# Altium PCB PCB_MainBoard.PcbDoc
Units mm, origin at the board's own origin, x right, y up, seen from the top; angles counter-clockwise.
Board outline 88.01 x 85.6 mm, 2 copper layers (Top Layer, Bottom Layer); 23 components, 28 nets, 103 pads, 8 vias.
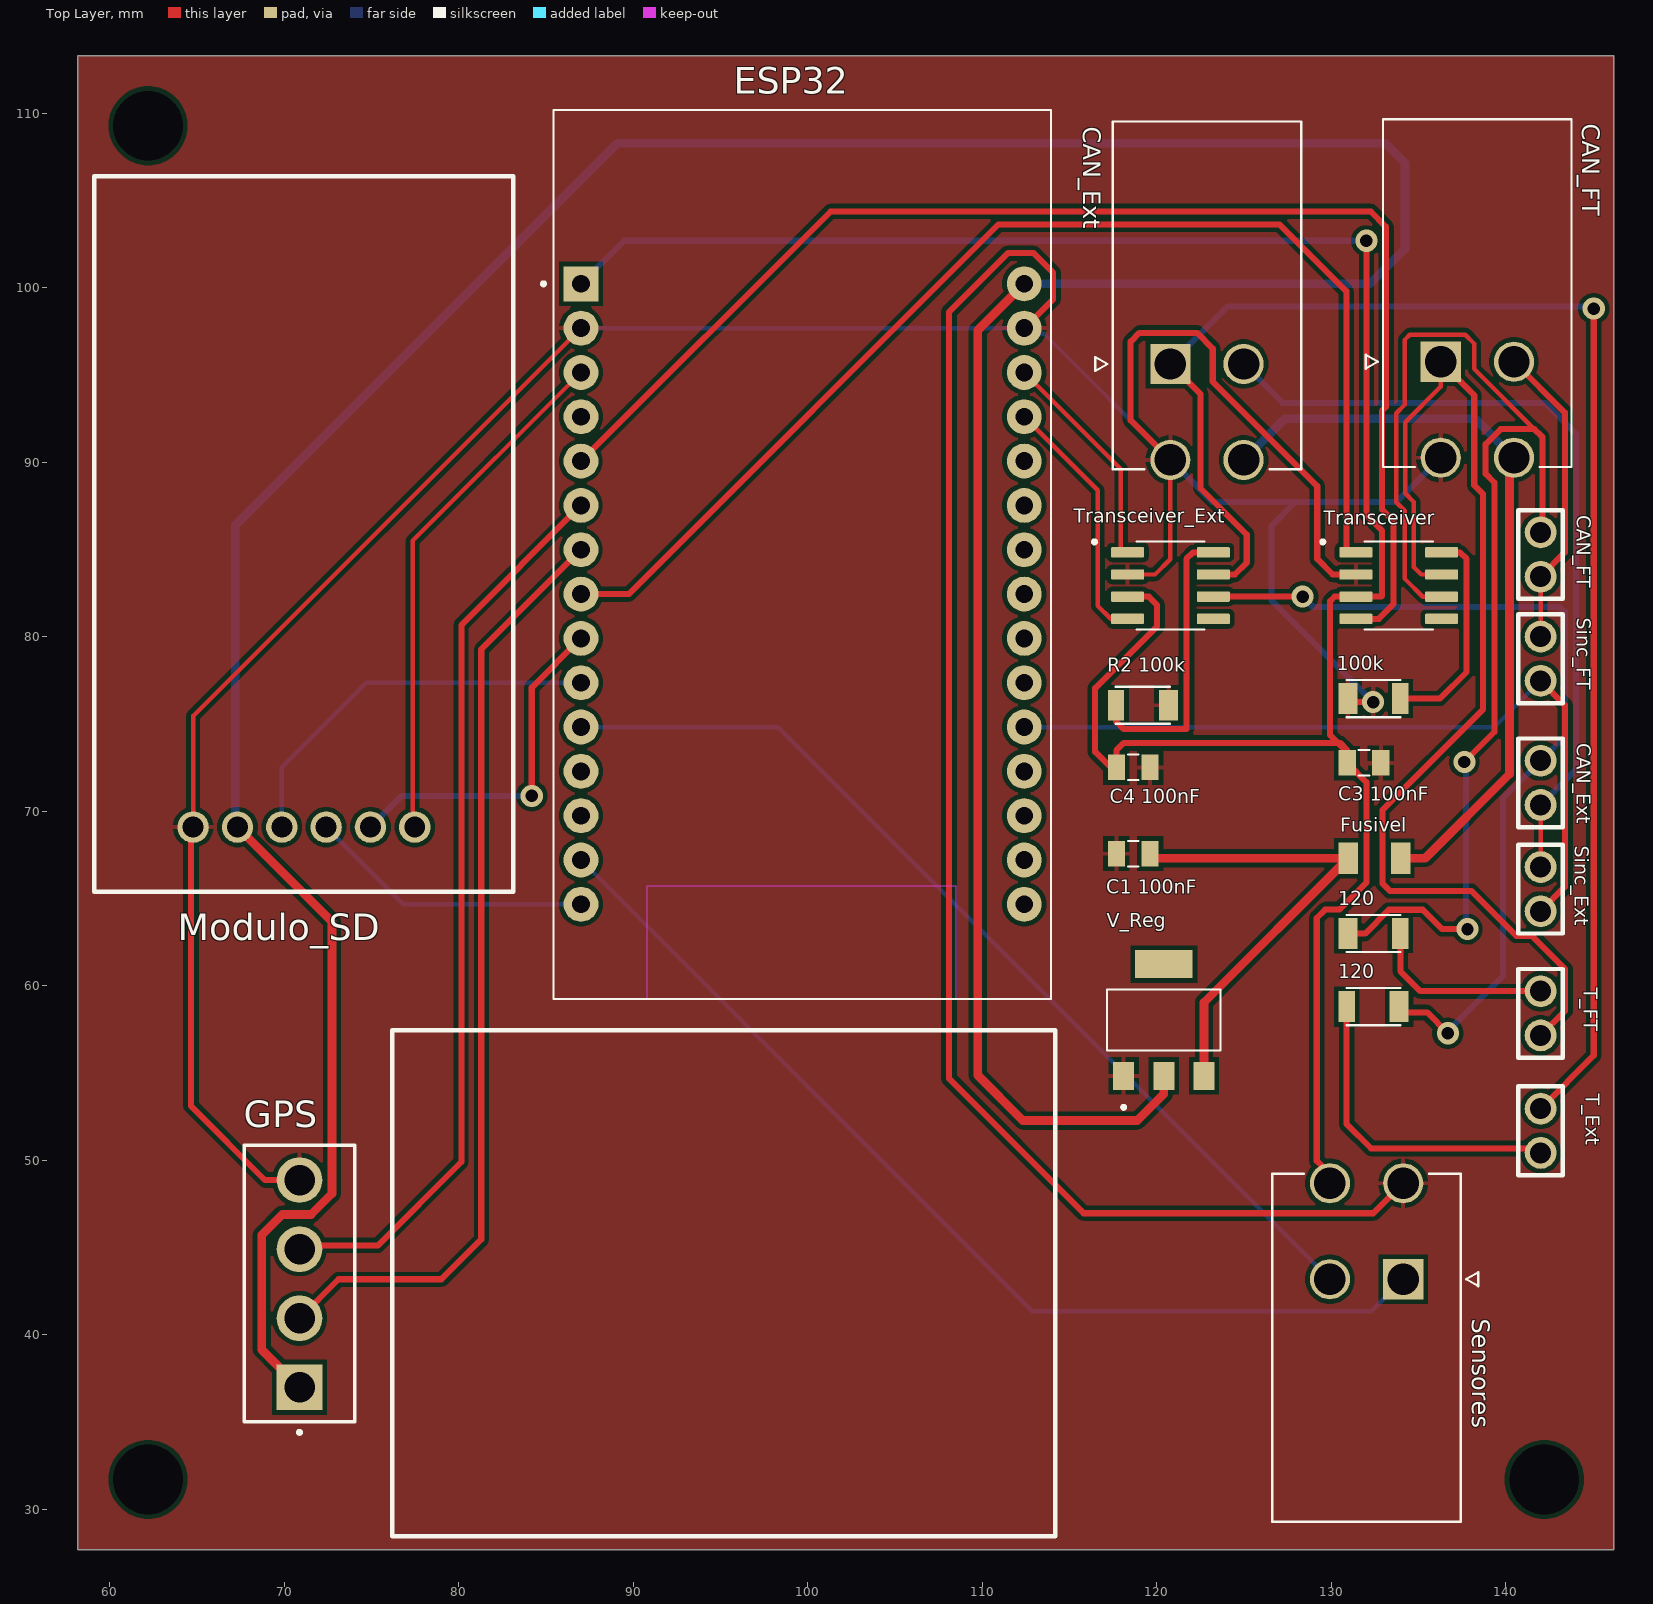
[diagram p0: Top Layer view]
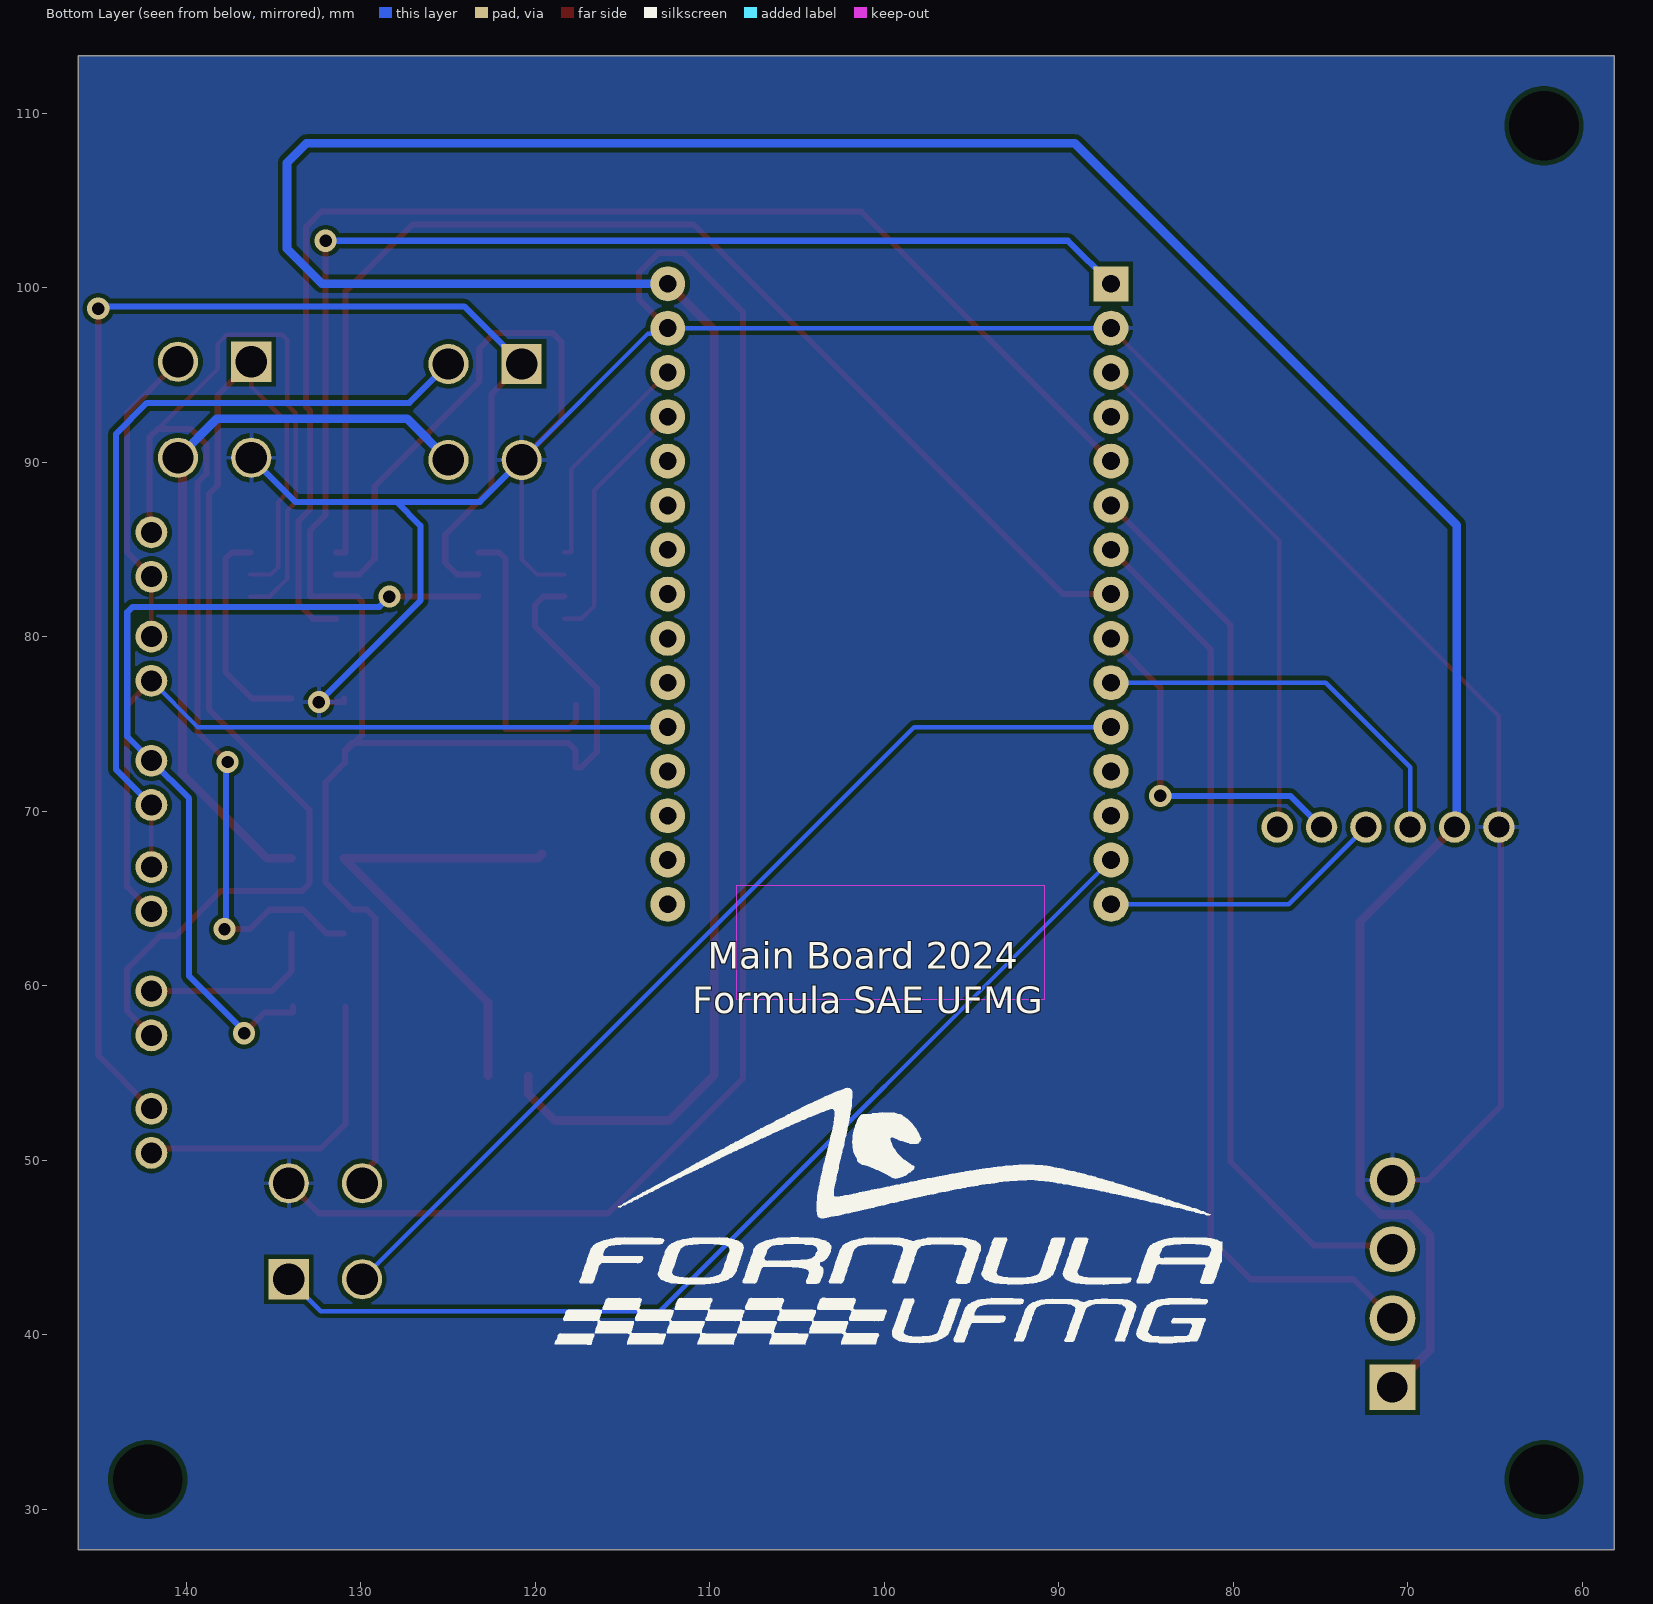
[diagram p1: Bottom Layer view, seen from below]

## Layer stack, top to bottom
Top Solder: solder mask 0.0102, Solder Resist, Dk 3.5
Top Layer: signal copper 0.0356
Dielectric 1: dielectric 0.32, FR-4, Dk 4.8
Bottom Layer: signal copper 0.0356
Bottom Solder: solder mask 0.0102, Solder Resist, Dk 3.5

## Board outline
58.166,27.686 146.177,27.686 146.177,113.284 58.166,113.284

## Design rules (kind name [scope] priority, off if disabled: settings)
Clearance [All] p1: gap=0.254 ignorepadtopadclearanceinfootprint=FALSE except(0: Arc-Hole Track-Hole SMDPad-Hole THPad-Hole Via-Hole Fill-Hole Poly-Hole Region-Hole Text-Hole; 0.3: Arc-Arc Arc-Track Arc-SMDPad Arc-THPad Arc-Via Track-Track Track-SMDPad Track-THPad Track-Via SMDPad-THPad SMDPad-Via THPad-THPad THPad-Via Via-Via)
PolygonConnect [All] p1: connectstyle=Relief reliefconductorwidth=0.254 reliefentries=4 polygonreliefangle="90 Angle" airgapwidth=0.254
RoutingVias [All] p1: holewidth=0.711 width=1.27 viastyle="Through Hole" minholewidth=0.711 minwidth=1.27 maxholewidth=0.711 maxwidth=1.27
SolderMaskExpansion [All] p1: expansion=0.102 istentingtop=FALSE
Width [All] p1: maxlimit=0.4 minlimit=0.254 preferedwidth=0.35 minimp=50.000000 maximp=50.000000 favimp=50.000000
30 further rules are at their usual default settings.

## Classes and differential pairs
component class Esquematico_MainBoard: 100k 120 "C1 100nF" "C3 100nF" "C4 100nF" CAN_Ext CAN_FT Fusivel GPS Modulo_SD "R2 100k" Sensores Sinc_Ext Sinc_FT T_Ext T_FT

## Components (designator, comment, footprint, x,y, rotation, side; value= is the part's Value field where it differs from the comment)
100k "CRG1206F620K" RESC3115X65N 132.414,76.454 r0 top
120 "CRG1206F620K" RESC3115X65N 132.414,58.801 r180 top
120 "CRG1206F620K" RESC3115X65N 132.414,62.992 r0 top
"C1 100nF" "C2012X5R1E225M085AC" *CAPC2012X100N 118.644,67.564 r180 top
"C3 100nF" "C2012X5R1E225M085AC" *CAPC2012X100N 131.864,72.771 r0 top
"C4 100nF" "C2012X5R1E225M085AC" *CAPC2012X100N 118.644,72.517 r0 top
CAN_Ext "2Pin" 2Pin 141.986,70.358 r90 top
CAN_Ext "874270402" MOLEX_874270402 120.768,95.631 r180 top
CAN_FT "2Pin" 2Pin 141.986,83.439 r90 top
CAN_FT "874270402" MOLEX_874270402 136.262,95.758 r180 top
Fusivel "F1206B3R00FWTR" *FUSM3216X140N 132.461,67.31 r180 top
GPS "FWJ-04-01-T-S" SAMTEC_FWJ-04-01-T-S 70.866,42.926 r90 top
Modulo_SD "Component_1" MICROSD_MODULE 59.11,65.388 r0 top
"R2 100k" "CRG1206F620K" RESC3115X65N 119.194,76.073 r180 top
Sensores "874270402" MOLEX_874270402 134.112,43.18 r0 top
Sinc_Ext "2Pin" 2Pin 141.986,64.262 r90 top
Sinc_FT "2Pin" 2Pin 141.986,77.47 r90 top
T_Ext "2Pin" 2Pin 141.986,50.419 r90 top
T_FT "2Pin" 2Pin 141.986,59.69 r270 top
Transceiver "MCP2551-E/SN" SOIC127P600X175-8N 133.858,82.931 r0 top
Transceiver_Ext "MCP2551-E/SN" SOIC127P600X175-8N 120.777,82.931 r0 top
V_Reg "TS1117BCW50_RPG" VREG_TS1117BCW50_RPG 120.396,58.039 r90 top (schematic designator Vreg)
? "ESP32-DEVKIT-V1" MODULE_ESP32_DEVKIT_V1 99.695,84.709 r0 top

## Footprints (in the part's own frame and the unit in brackets; to place one, negate y for a bottom-side part, rotate by r counter-clockwise, add the part's x,y. Pads: shape width x height; smd on the part's side, far side on the other; paste and mask are expansions set on the pad)
2Pin [mm]
  round 1.82 hole 1.2: 0(0,0) 1(2.54,0)
  silkscreen extent -1.27,-1.27 3.81,1.27, body extent -1.27,-1.19 3.79,1.27, height 8.54
*CAPC2012X100N [mm]
  rect 0.99x1.47 smd: 1(-0.965,0) 2(0.965,0)
  silkscreen extent -0.3,-0.73 0.3,0.73, body extent -1.05,-0.67 1.05,0.67, height 0.95
*FUSM3216X140N [mil]
  rect 44x71 smd: 1(-59,0) 2(59,0)
MICROSD_MODULE [mm]
  round 1.8 hole 1.2: 0(5.66,3.7) 1(8.2,3.7) 2(10.74,3.7) 3(13.28,3.7) 4(15.82,3.7) 5(18.36,3.7)
  silkscreen extent 0,0 24,41, body extent 0,-4.3 24,41.65, height 6.25
MODULE_ESP32_DEVKIT_V1 [mm]
  rect 2x2 / inner round 2 / far side rect 2x2 hole 1.02: 1(-12.7,15.515)
  round 2 hole 1.02: 2(-12.7,12.975) 3(-12.7,10.435) 4(-12.7,7.895) 5(-12.7,5.355) 6(-12.7,2.815) 7(-12.7,0.275) 8(-12.7,-2.265) 9(-12.7,-4.805) 10(-12.7,-7.345) 11(-12.7,-9.885) 12(-12.7,-12.425) 13(-12.7,-14.965) 14(-12.7,-17.505) 15(-12.7,-20.045) 16(12.7,-20.045) 17(12.7,-17.505) 18(12.7,-14.965) 19(12.7,-12.425) 20(12.7,-9.885) 21(12.7,-7.345) 22(12.7,-4.805) 23(12.7,-2.265) 24(12.7,0.275) 25(12.7,2.815) 26(12.7,5.355) 27(12.7,7.895) 28(12.7,10.435) 29(12.7,12.975) 30(12.7,15.515)
  Keep-Out Layer region: 8.78,-25.475 -8.91,-25.475 -8.91,-18.985 8.78,-18.985
  silkscreen extent -14.95,-25.47 14.23,25.47
MOLEX_874270402 [mm]
  rect 2.3x2.3 hole 1.8 mask+0.076: 1(0,0)
  round 2.3 hole 1.8 mask+0.076: 2(-4.2,0) 3(0,5.5) 4(-4.2,5.5)
  silkscreen extent -7.5,-13.9 4.3,6.04, body extent -7.62,-13.78 3.18,6.16, height 11.4
RESC3115X65N [mm]
  rect 1.09x1.77 smd: 1(-1.465,0)
  rect 0.94x1.77 smd: 2(1.54,0)
  silkscreen extent -1.55,-1.07 1.55,1.07, body extent -1.6,-0.8 1.6,0.8, height 0.55
SAMTEC_FWJ-04-01-T-S [mm]
  rect 2.625x2.625 hole 1.75: 01(-5.94,0)
  round 2.625 hole 1.75: 02(-1.98,0) 03(1.98,0) 04(5.94,0)
  silkscreen extent -8.62,-3.18 7.92,3.18
SOIC127P600X175-8N [mm]
  rrect25% 1.9x0.6 smd: 1(-2.455,1.905) 2(-2.455,0.635) 3(-2.455,-0.635) 4(-2.455,-1.905) 5(2.455,-1.905) 6(2.455,-0.635) 7(2.455,0.635) 8(2.455,1.905)
  silkscreen extent -4.45,-2.53 1.95,2.6, body extent -3,-2.45 3,2.45, height 1.75
VREG_TS1117BCW50_RPG [mm]
  rect 1.6x1.2 smd: 1(-3.2,2.3) 2(-3.2,0) 3(-3.2,-2.3)
  rect 1.6x3.3 smd: 4(3.2,0)
  silkscreen extent -5.1,-3.25 1.75,3.25, body extent -3.5,-3.25 3.5,3.25, height 1.9

## Part data
100k 120 120 "R2 100k": "Res Thick Film 1206 620K Ohm 1% 0.25W_1/4W_ Â±100ppm/C Pad SMD T/R", Package="1206 TE Connectivity", Availability=Unavailable, MF="TE Connectivity", MP=CRG1206F620K, Price="0.00 USD", SnapEDA_Link=https://www.snapeda.com/parts/CRG1206F620K/TE%20Connectivity%20/%20DEUTSCH/view-part/?ref=snap
"C1 100nF" "C3 100nF" "C4 100nF": "Cap Ceramic 2.2uF 25V X5R 20% SMD 0805 85Â°C Punched Paper T/R", Package="0805 TDK", Availability=Unavailable, MF=TDK, MP=C2012X5R1E225M085AC, Price=None, SnapEDA_Link=https://www.snapeda.com/parts/C2012X5R1E225M085AC/TDK/view-part/?ref=snap
CAN_Ext CAN_FT Sensores: "Conn Wire to Board HDR 4 POS 4.2mm Solder RA Side Entry Thru-Hole Mini-Fit Jrâ„¢ Tray", Package=None, Availability="In Stock", Check_prices=https://www.snapeda.com/parts/874270402/Molex/view-part/?ref=eda, MF=Molex, MP=874270402, Price=None, Purchase-URL=https://pricing.snapeda.com/search/part/874270402/?ref=eda, SnapEDA_Link=https://www.snapeda.com/parts/874270402/Molex/view-part/?ref=snap
Fusivel: "F1206B Series Fast Acting 63 V 3 A 1206 Surface Mount Thin-Film Fuse T&R", Package="1206 AVX", Availability=Unavailable, MF=AVX, MP=F1206B3R00FWTR, Price=None, SnapEDA_Link=https://www.snapeda.com/parts/F1206B3R00FWTR/AVX%20/%20Kyocera/view-part/?ref=snap
GPS: "Connector Header Through Hole 4 position 0.156 (3.96mm)", Package=None, Availability=Bad, Check_prices=https://www.snapeda.com/parts/FWJ-04-01-T-S/Samtec/view-part/3573755/?ref=eda, MF=Samtec, MP=FWJ-04-01-T-S, Price=None, Purchase-URL=https://pricing.snapeda.com/search/part/FWJ-04-01-T-S/?ref=eda, SnapEDA_Link=https://www.snapeda.com/parts/FWJ-04-01-T-S/Samtec/view-part/3573755/?ref=snap
Transceiver Transceiver_Ext: "1/1 Transceiver Half CANbus 8-SOIC", Package="SOIC-8 Microchip", Availability="In Stock", Check_prices=https://www.snapeda.com/parts/MCP2551-E/SN/Microchip/view-part/?ref=eda, MF=Microchip, MP=MCP2551-E/SN, Price=None, Purchase-URL=https://pricing.snapeda.com/search/part/MCP2551-E/SN/?ref=eda, SnapEDA_Link=https://www.snapeda.com/parts/MCP2551-E/SN/Microchip/view-part/?ref=snap
V_Reg: library part Component_1
?: "Dual core, Wi-Fi: 2.4 GHz up to 150 Mbits/s,BLE (Bluetooth Low Energy) and legacy Bluetooth, 32 bits, Up to 240 MHz", Package=None, Availability="Not in stock", Check_prices=https://www.snapeda.com/parts/ESP32-DEVKIT-V1/Do+it/view-part/?ref=eda, MF="Do it", MP=ESP32-DEVKIT-V1, Price=None, SnapEDA_Link=https://www.snapeda.com/parts/ESP32-DEVKIT-V1/Do+it/view-part/?ref=snap

## Free pads (board coordinates)
  round 1.524 hole 4: 2(62.187,31.711) 2(62.187,109.284) 2(142.198,31.711)

## Via types
v1: diameter 1.27, hole 0.711, Top Layer to Bottom Layer, 8 vias

## Nets (pads, with @x,y where several pads share a name; then routed paths per layer and width w, separated by ;. In a path a pad name is that pad's centre, name@x,y a point inside that pad or via, vN(x,y) a via of type N, cw(c..) or ccw(c..) an arc to the next point about the centre after c; other vN are vias at no path point)
GND: 100k.1 "C1 100nF.2" "C3 100nF.2" "C4 100nF.2" "R2 100k.1" ?.2 ?.29 CAN_Ext.3 CAN_FT.3 GPS.04 Modulo_SD.0 Sensores.3 Transceiver.2 Transceiver_Ext.2 V_Reg.1 | length 256.5
  Top Layer w0.254: Modulo_SD.0 64.77,75.459 ?.2 ; Transceiver_Ext.2 119.888,83.566 120.768,84.446 CAN_Ext.3
  Top Layer w0.35: Modulo_SD.0 64.643,68.961 64.643,53.11 68.887,48.866 GPS.04 ; ?.29 114.046,99.335 114.046,100.863 112.928,101.981 111.455,101.981 108.077,98.603 108.077,54.686 115.799,46.965 132.397,46.965 Sensores.3 ; CAN_Ext.3 118.491,92.408 118.491,96.901 118.999,97.409 122.301,97.409 123.198,96.512 123.198,94.615 129.184,88.628 129.184,84.455 130.073,83.566 Transceiver.2 ; 100k.1 130.949,76.251 v1(132.385,76.251)
  Bottom Layer w0.254: ?.2 ?.29 112.708,97.371 113.528,97.371 CAN_Ext.3
  Bottom Layer w0.35: CAN_Ext.3 123.167,87.732 127.94,87.732 ; v1(132.385,76.251) 126.568,82.067 126.568,86.36 127.94,87.732 ; CAN_FT.3 133.736,87.732 127.94,87.732
Net2Pin_CAN_0: 120.2@133.954,62.992 T_FT.0 | length 10.7
  Top Layer w0.35: 120.2@133.954,62.992 133.954,60.833 135.097,59.69 T_FT.0
Net2Pin_CAN_1: CAN_FT.1@136.262,95.758 T_FT.1 Transceiver.7 | length 64.8
  Top Layer w0.254: CAN_FT.1@136.262,95.758 136.262,94.336 134.223,92.297 134.223,88.219 134.722,87.72 134.722,83.993 135.149,83.566 Transceiver.7
  Top Layer w0.35: CAN_FT.1@136.262,95.758 138.187,93.833 138.187,88.683 138.684,88.186 138.684,75.819 132.918,70.053 132.918,65.862 133.35,65.43 138.024,65.43 140.589,62.865 141.478,62.865 143.383,60.96 143.383,58.547 T_FT.1
Net100k_2: 100k.2 Transceiver.8 | length 12.5
  Top Layer w0.35: 100k.2 136.22,76.454 137.744,77.978 137.744,84.455 137.363,84.836 Transceiver.8
Net120_1: 120.1@130.949,62.992 CAN_FT.1@141.986,85.979 Transceiver.6 | length 73.8
  Top Layer w0.254: Transceiver.6 135.23,82.296 134.214,83.312 134.214,87.212 133.715,87.711 133.715,92.805 134.214,93.304 134.214,97.028 134.493,97.307 137.668,97.307 138.176,96.799 138.176,95.352 141.63,91.897 142.011,91.516
  Top Layer w0.35: 120.1@130.949,62.992 131.927,62.992 133.287,64.352 135.235,64.352 136.341,63.246 v1(137.795,63.246) ; v1(137.617,72.822) 139.344,74.549 139.344,88.824 138.837,89.331 138.837,91.034 139.7,91.897 141.63,91.897 142.011,91.516 142.088,91.44 142.088,86.081 CAN_FT.1@141.986,85.979
  Bottom Layer w0.35: v1(137.617,72.822) 137.706,72.733 137.706,63.335 v1(137.795,63.246)
Net_1: "C3 100nF.1" "C4 100nF.1" ?.1 Sensores.4 Transceiver.3 Transceiver_Ext.3 | length 134.1
  Top Layer w0.35: Transceiver_Ext.3 119.532,82.296 120.015,81.813 120.015,80.606 116.459,77.05 116.459,73.406 117.348,72.517 117.679,72.517 117.679,73.483 118.11,73.914 130.365,73.914 ; Sensores.4 129.912,49.208 129.159,49.961 129.159,63.881 129.642,64.364 130.454,64.364 132.004,65.913 132.004,71.666 130.899,72.771 130.899,73.381 ; v1(132.004,102.692) 132.004,86.977 132.901,86.081 132.901,82.342 132.854,82.296 Transceiver.3 130.175,82.296 129.921,82.042 129.921,74.358 130.365,73.914 ; 130.365,73.914 130.899,73.381 ; 130.365,73.914 130.493,73.914 130.899,73.508 130.899,73.381
  Bottom Layer w0.35: ?.1 89.463,102.692 v1(132.004,102.692)
Net_3: ?.3 Modulo_SD.5 | length 30.1
  Top Layer w0.254: Modulo_SD.5 77.343,69.215 77.343,85.492 ?.3
Net_5: ?.5 Transceiver.4 | length 76.9
  Top Layer w0.35: ?.5 101.3,104.369 132.258,104.369 133.121,103.505 133.121,93.167 132.893,92.939 132.893,87.3 133.553,86.639 133.553,81.864 132.715,81.026 Transceiver.4
Net_6: ?.6 GPS.03 | length 51.8
  Top Layer w0.35: GPS.03 71.068,45.108 75.346,45.108 80.137,49.899 80.137,80.666 ?.6
Net_7: ?.7 GPS.02 | length 54.2
  Top Layer w0.35: GPS.02 73.1,43.18 78.994,43.18 81.28,45.466 81.28,79.269 ?.7
Net_8: ?.8 Transceiver.1 | length 69.7
  Top Layer w0.35: ?.8 89.734,82.444 110.922,103.632 127.023,103.632 130.856,99.799 130.856,84.836 Transceiver.1
Net_9: ?.9 Modulo_SD.4 | length 20.2
  Top Layer w0.35: v1(84.176,70.876) 84.176,77.085 ?.9
  Bottom Layer w0.35: Modulo_SD.4 76.718,70.876 v1(84.176,70.876)
Net_10: ?.10 Modulo_SD.2 | length 22.6
  Bottom Layer w0.254: Modulo_SD.2 69.85,72.517 74.697,77.364 ?.10
Net_11: ?.11 Sensores.2 | length 56
  Bottom Layer w0.254: ?.11 98.268,74.824 Sensores.2
Net_14: ?.14 Sensores.1 | length 58.6
  Bottom Layer w0.254: ?.14 112.848,41.351 132.283,41.351 Sensores.1
Net_15: ?.15 Modulo_SD.3 | length 16.4
  Bottom Layer w0.254: Modulo_SD.3 76.814,64.664 ?.15
Net_20: ?.20 Sinc_Ext.0 Sinc_FT.0 | length 45.1
  Top Layer w0.35: Sinc_Ext.0 143.383,65.659 143.383,76.073 Sinc_FT.0
  Bottom Layer w0.254: ?.20 139.34,74.824 Sinc_FT.0
Net_27: ?.27 Transceiver_Ext.4 | length 14.6
  Top Layer w0.254: ?.27 116.611,88.388 116.611,81.763 117.348,81.026 Transceiver_Ext.4
Net_28: ?.28 Transceiver_Ext.1 | length 13
  Top Layer w0.254: ?.28 117.932,89.607 117.932,84.836 Transceiver_Ext.1
Net_30: ?.30 GPS.01 Modulo_SD.1 V_Reg.2 | length 219.2
  Top Layer w0.5: Modulo_SD.1 72.729,63.669 72.729,48.095 71.52,46.886 69.873,46.886 68.707,45.72 68.707,39.145 GPS.01 ; ?.30 109.728,97.557 109.728,54.864 112.319,52.273 118.872,52.273 120.396,53.797 V_Reg.2
  Bottom Layer w0.5: Modulo_SD.1 67.183,69.215 67.183,86.385 89.078,108.28 133.096,108.28 134.214,107.163 134.214,102.232 132.206,100.224 ?.30
"NetC1 100nF_1": "C1 100nF.1" Fusivel.2 V_Reg.3 | length 27.4
  Top Layer w0.5: 119.609,67.564 119.609,67.555 119.854,67.31 Fusivel.2 122.696,59.044 V_Reg.3
NetCAN_Ext_1: CAN_Ext.1@120.768,95.631 T_Ext.1 Transceiver_Ext.7 | length 88.2
  Top Layer w0.35: CAN_Ext.1@120.768,95.631 122.504,93.895 122.504,88.494 125.146,85.852 125.146,84.252 124.46,83.566 Transceiver_Ext.7 ; T_Ext.1 145.034,56.007 v1(145.034,98.806)
  Bottom Layer w0.35: CAN_Ext.1@120.768,95.631 124.07,98.933 144.907,98.933 v1(145.034,98.806)
NetCAN_Ext_2: CAN_Ext.0 CAN_Ext.2 Sinc_Ext.1 | length 46.4
  Top Layer w0.254: Sinc_Ext.1 CAN_Ext.0
  Bottom Layer w0.35: CAN_Ext.2 127.203,93.396 142.24,93.396 144.021,91.615 144.021,72.393 CAN_Ext.0
NetCAN_Ext_4: CAN_Ext.4 CAN_FT.4 Fusivel.1 | length 43.9
  Top Layer w0.5: Fusivel.1 135.382,67.31 140.208,72.136 140.208,90.004 CAN_FT.4
  Bottom Layer w0.5: CAN_Ext.4 127.322,92.485 138.235,92.485 CAN_FT.4
NetCAN_FT_2: CAN_FT.0 CAN_FT.2 Sinc_FT.1 | length 17.5
  Top Layer w0.254: Sinc_FT.1 CAN_FT.0
  Top Layer w0.35: CAN_FT.2 143.383,92.837 143.383,84.836 CAN_FT.0
"NetR2 100k_2": "R2 100k.2" Transceiver_Ext.8 | length 16.6
  Top Layer w0.35: 117.654,76.073 117.654,75.157 118.11,74.701 121.691,74.701 121.691,84.455 122.072,84.836 Transceiver_Ext.8
"NetR2 120_1": 120.1@133.879,58.801 CAN_Ext.1@141.986,72.898 Transceiver_Ext.6 | length 51
  Top Layer w0.35: Transceiver_Ext.6 v1(128.346,82.296) ; 120.1@133.879,58.801 133.879,58.471 135.481,58.471 v1(136.675,57.277)
  Bottom Layer w0.35: v1(128.346,82.296) 128.93,81.712 143.066,81.712 143.371,81.407 143.371,74.283 141.986,72.898 139.827,70.739 139.827,60.548 136.675,57.396 v1(136.675,57.277)
"NetR2 120_2": 120.2@130.874,58.801 T_Ext.0 | length 18.5
  Top Layer w0.35: 120.2@130.874,58.801 130.874,52.07 132.271,50.673 141.732,50.673 T_Ext.0
pads on no net: ?.4 ?.12 ?.13 ?.16 ?.17 ?.18 ?.19 ?.21 ?.22 ?.23 ?.24 ?.25 ?.26 Transceiver.5 Transceiver_Ext.5 V_Reg.4

## Polygon pours and split planes (outlines as drawn)
no net on Top Overlay "c" (solid): 147.701,-61.976 147.574,-62.103 147.574,-99.822 175.895,-99.822 175.895,-61.976
GND on Top Layer "NONET_L01_P-001" (solid, pour order 1): 58.187,113.284 58.187,27.711 146.198,27.711 146.198,113.284
GND on Bottom Layer "NONET_L01_P-001" (solid, pour order 2): 146.177,113.284 58.166,113.284 58.166,27.686 146.177,27.686

## Silkscreen, mask and mechanical layers (free items; w line width, h text height)
Top Overlay:
  lines w0.254: 76.173,28.448 114.173,28.448 114.173,57.448 76.173,57.448 76.173,28.448
  text "ESP32" at 95.758,111.125 h1.52
Bottom Overlay:
  drawing of 19 lines, arcs and shapes, not listed
  text "Main Board 2024" at 110.109,60.96 h1.52
  text "Formula SAE UFMG" at 110.998,58.42 h1.52